# Altium PCB v2上.PcbDoc
Units mm, origin at the board's own origin, x right, y up, seen from the top; angles counter-clockwise.
Board outline 76.2 x 58.42 mm, 2 copper layers (Top Layer, Bottom Layer), stack 0.325 mm thick; 4 components, 7 nets, 88 pads, 0 vias.
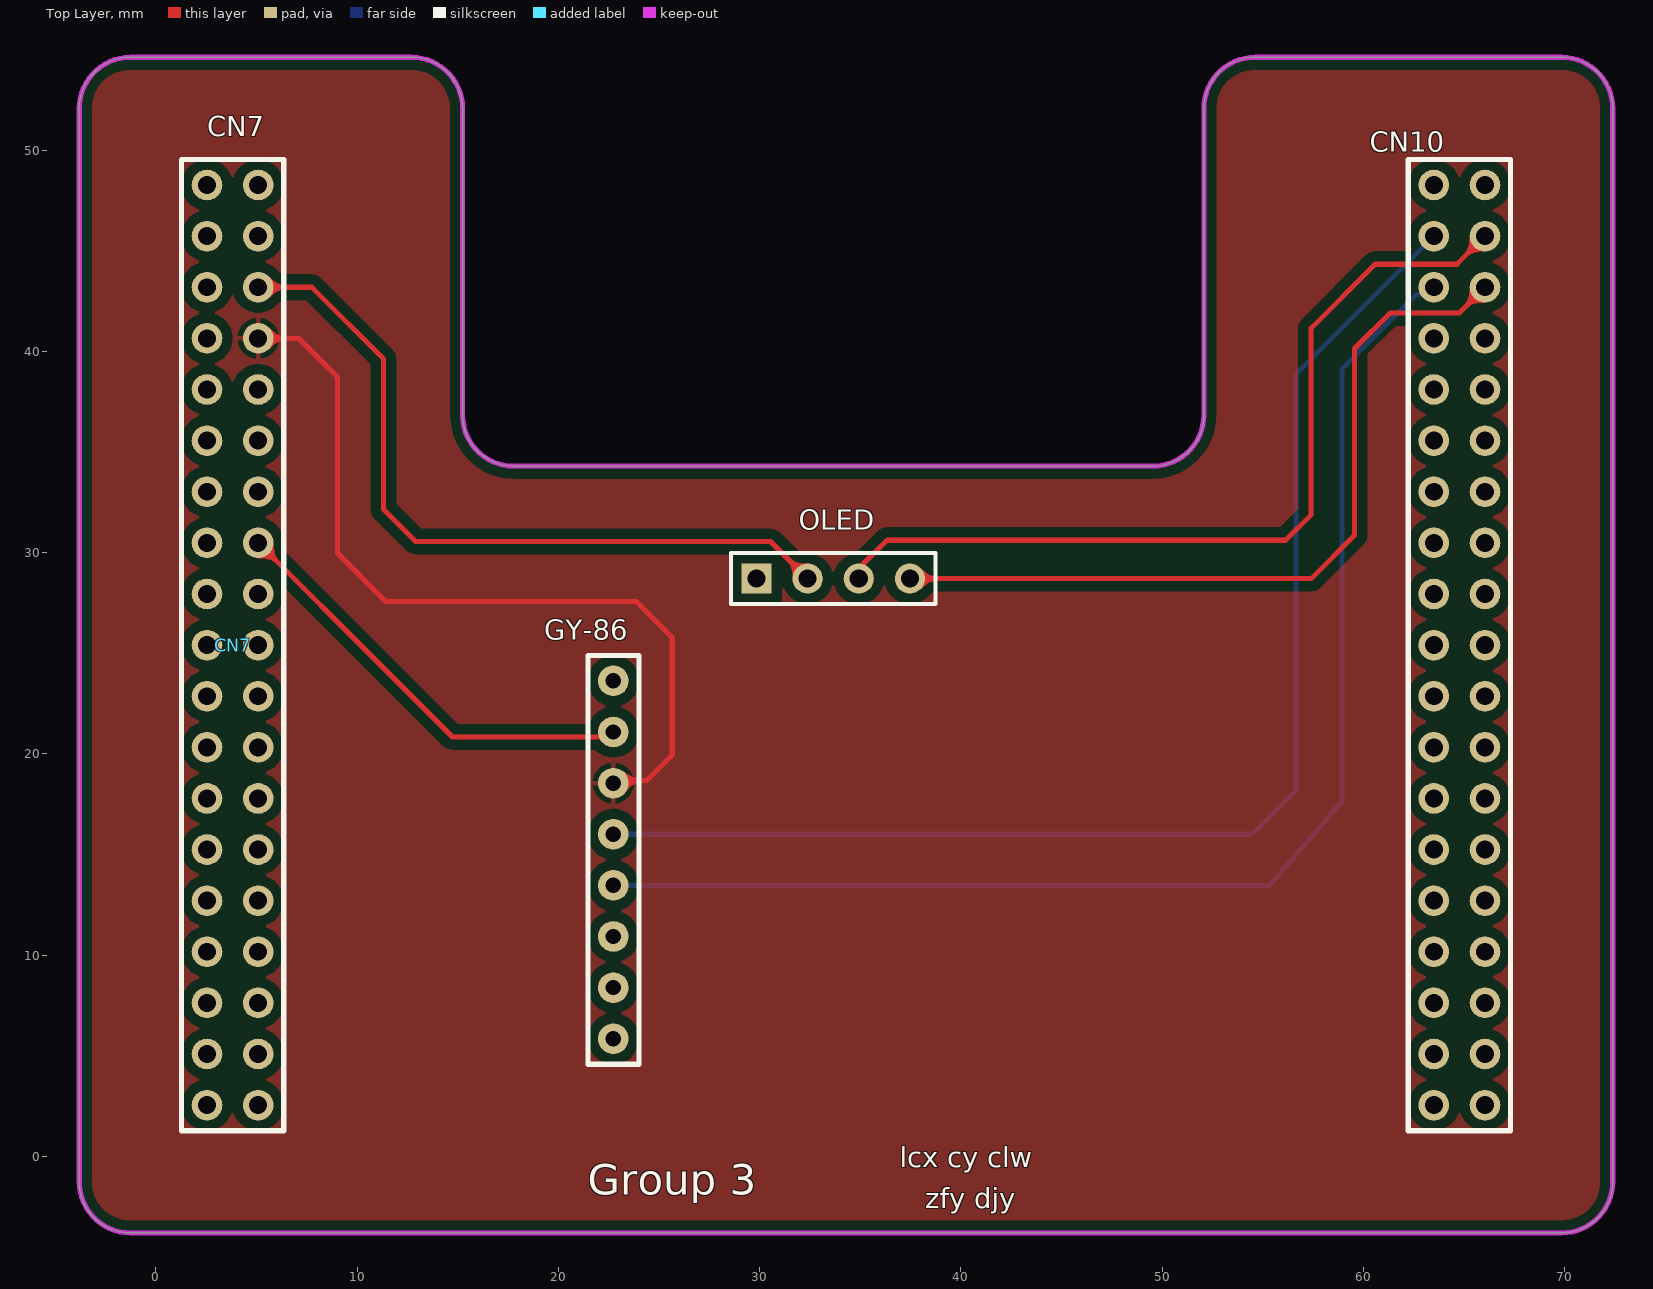
[diagram p0: Top Layer view]
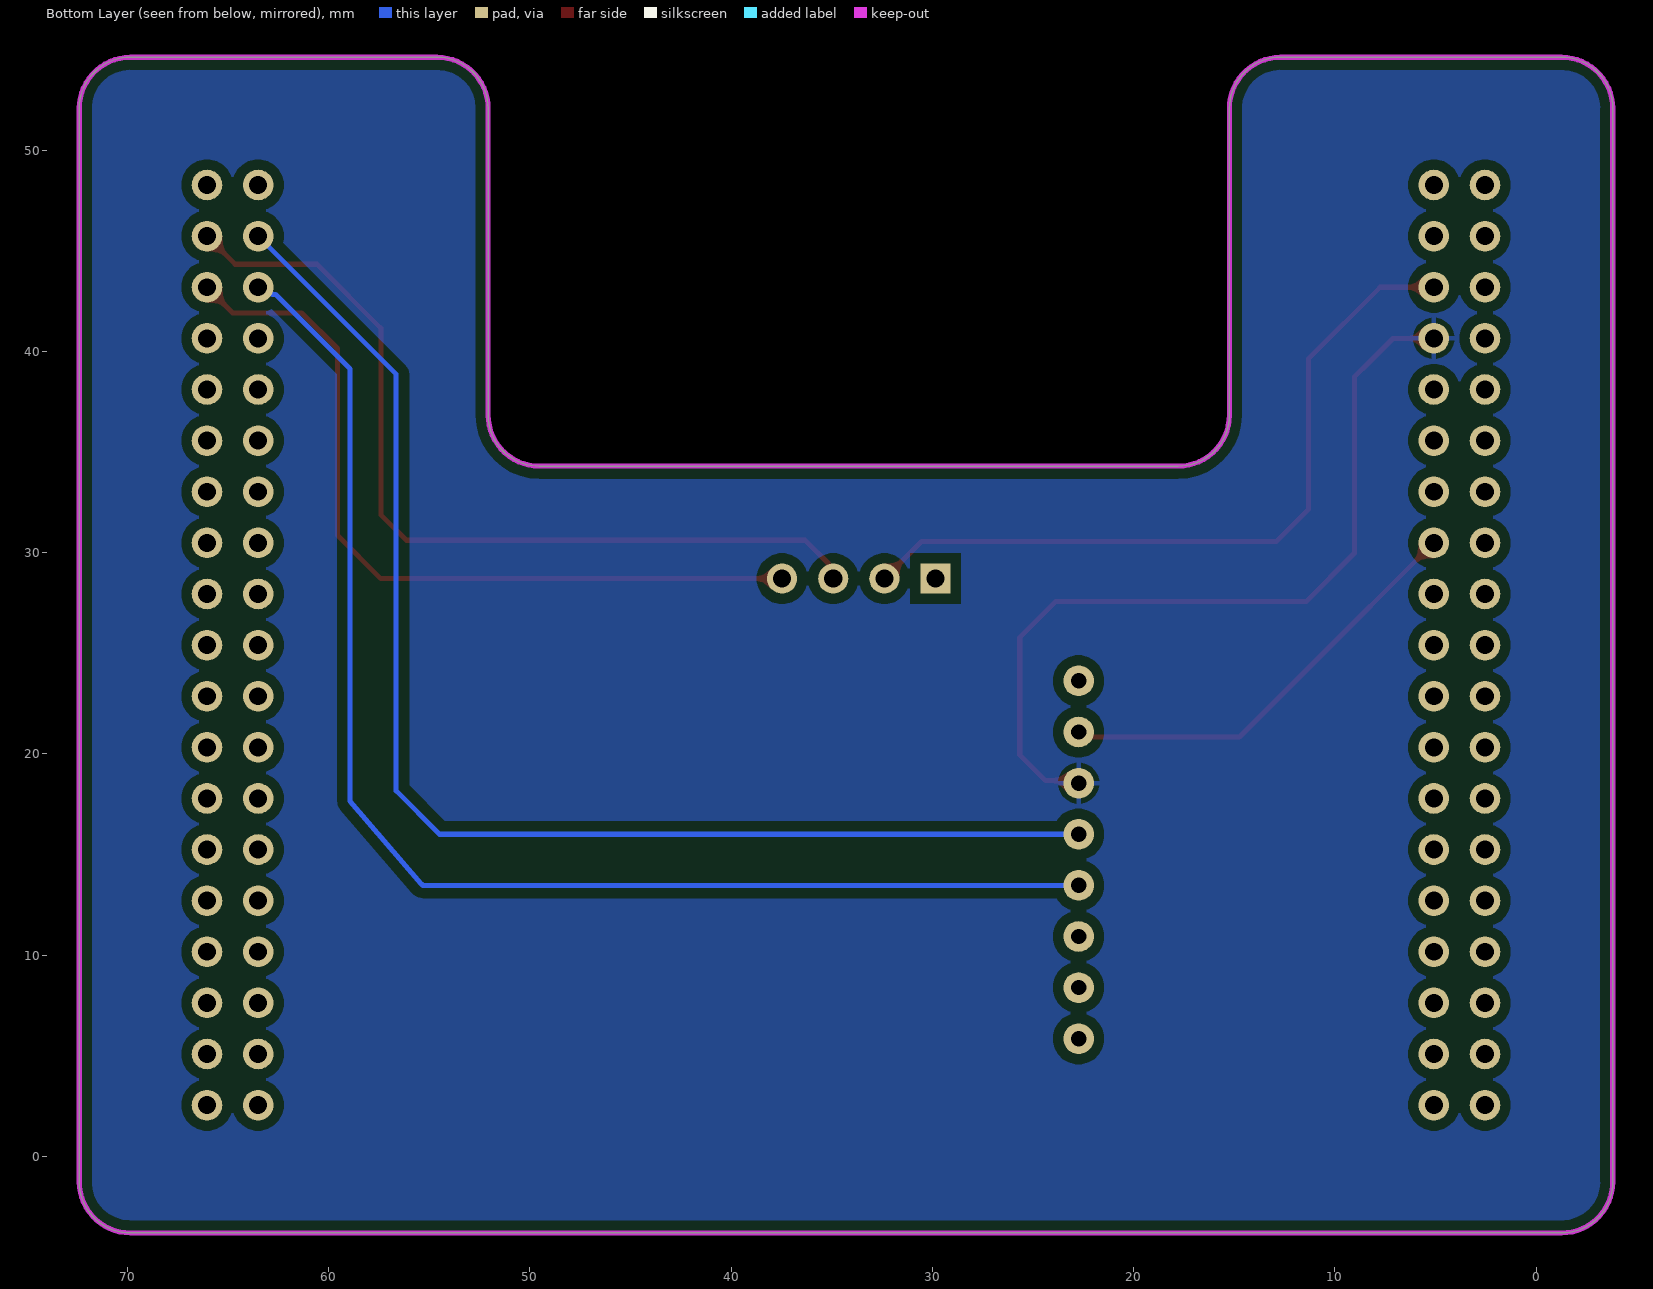
[diagram p1: Bottom Layer view, seen from below]

## Layer stack, top to bottom
Top Solder: solder mask 0.0102, Solder Resist, Dk 3.5
Top Layer: signal copper 0.0356
Dielectric 1: core 0.254, FR-4, Dk 4.2
Bottom Layer: signal copper 0.0356
Bottom Solder: solder mask 0.0102, Solder Resist, Dk 3.5

## Board outline
-3.81,-1.27 ccw(c-1.27,-1.27) -1.27,-3.81 69.85,-3.81 ccw(c69.85,-1.27) 72.39,-1.27 72.39,52.07 ccw(c69.85,52.07) 69.85,54.61 54.61,54.61 ccw(c54.61,52.07) 52.07,52.07 52.07,36.83 cw(c49.53,36.83) 49.53,34.29 17.78,34.29 cw(c17.78,36.83) 15.24,36.83 15.24,52.07 ccw(c12.7,52.07) 12.7,54.61 -1.27,54.61 ccw(c-1.27,52.07) -3.81,52.07

## Design rules (kind name [scope] priority, off if disabled: settings)
Clearance InPolygon [InPolygon] p1: gap=0.5 ignorepadtopadclearanceinfootprint=FALSE except(0: Arc-Hole Track-Hole SMDPad-Hole THPad-Hole Via-Hole Fill-Hole Poly-Hole Region-Hole Text-Hole)
Clearance [All] p2: gap=0.254 ignorepadtopadclearanceinfootprint=FALSE except(0: Arc-Hole Track-Hole SMDPad-Hole THPad-Hole Via-Hole Fill-Hole Poly-Hole Region-Hole Text-Hole)
PolygonConnect [All] p1: connectstyle=Relief reliefconductorwidth=0.254 reliefentries=4 polygonreliefangle="90 Angle" airgapwidth=0.254
RoutingVias [All] p1: holewidth=0.711 width=1.27 viastyle="Through Hole" minholewidth=0.711 minwidth=1.27 maxholewidth=0.711 maxwidth=1.27
SolderMaskExpansion [All] p1: expansion=0.102 istentingtop=FALSE
Width Width_5V [InNetClass('5V')] p1: maxlimit=0.51 minlimit=0.506 preferedwidth=0.508
Width Width_3V3 [InNetClass('3V3')] p2: maxlimit=0.51 minlimit=0.506 preferedwidth=0.508
Width [All] p3: maxlimit=0.256 minlimit=0.252 preferedwidth=0.254
30 further rules are at their usual default settings.

## Classes and differential pairs
component class v2上: CN7 OLED

## Components (designator, comment, footprint, x,y, rotation, side; value= is the part's Value field where it differs from the comment)
CN7 "CN7" CN7 2.54,2.54 r0 top
GY-86 "GY-86" GY-86 22.733,23.622 r0 top
OLED "OLED" HDR1X4 29.845,28.702 r0 top
? "CN10" CN10 66.04,2.54 r0 top

## Footprints (in the part's own frame and the unit in brackets; to place one, negate y for a bottom-side part, rotate by r counter-clockwise, add the part's x,y. Pads: shape width x height; smd on the part's side, far side on the other; paste and mask are expansions set on the pad)
CN7 [mil]
  round 60 hole 35: 1(0,1800) 2(100,1800) 3(0,1700) 4(100,1700) 5(0,1600) 6(100,1600) 7(0,1500) 8(100,1500) 9(0,1400) 10(100,1400) 11(0,1300) 12(100,1300) 13(0,1200) 14(100,1200) 15(0,1100) 16(100,1100) 17(0,1000) 18(100,1000) 19(0,900) 20(100,900) 21(0,800) 22(100,800) 23(0,700) 24(100,700) 25(0,600) 26(100,600) 27(0,500) 28(100,500) 29(0,400) 30(100,400) 31(0,300) 32(100,300) 33(0,200) 34(100,200) 35(0,100) 36(100,100) 37(0,0) 38(100,0)
  silkscreen extent -50,-50 150,1850
CN10 [mil]
  round 60 hole 35: 1(-100,1800) 2(0,1800) 3(-100,1700) 4(0,1700) 5(-100,1600) 6(0,1600) 7(-100,1500) 8(0,1500) 9(-100,1400) 10(0,1400) 11(-100,1300) 12(0,1300) 13(-100,1200) 14(0,1200) 15(-100,1100) 16(0,1100) 17(-100,1000) 18(0,1000) 19(-100,900) 20(0,900) 21(-100,800) 22(0,800) 23(-100,700) 24(0,700) 25(-100,600) 26(0,600) 27(-100,500) 28(0,500) 29(-100,400) 30(0,400) 31(-100,300) 32(0,300) 33(-100,200) 34(0,200) 35(-100,100) 36(0,100) 37(-100,0) 38(0,0)
  silkscreen extent -150,-50 50,1850
GY-86 [mil]
  round 60 hole 30: 1(0,0) 2(0,-100) 3(0,-200) 4(0,-300) 5(0,-400) 6(0,-500) 7(0,-600) 8(0,-700)
  silkscreen extent -50,-750 50,50
HDR1X4 [mm] "Connector; Header; 4 Position"
  rect 1.5x1.5 hole 0.9: 1(0,0)
  round 1.5 hole 0.9: 2(2.54,0) 3(5.08,0) 4(7.62,0)
  silkscreen extent -1.27,-1.27 8.89,1.27

## Part data
OLED: library part "Header 4", "Header, 4-Pin", LatestRevisionDate=17-Jul-2002, LatestRevisionNote="Re-released for DXP Platform.", Publisher="Altium Limited"

## Nets (pads, with @x,y where several pads share a name; then routed paths per layer and width w, separated by ;. In a path a pad name is that pad's centre, name@x,y a point inside that pad or via, vN(x,y) a via of type N, cw(c..) or ccw(c..) an arc to the next point about the centre after c; other vN are vias at no path point)
3V3_2: CN7.16 GY-86.2 | length 21.8
  Top Layer w0.254: CN7.16 11.303,24.257 14.732,20.828 21.949,20.828 21.96,20.839 22.49,20.839 GY-86.2
5V: CN7.6 OLED.2 | length 37.6
  Top Layer w0.254: CN7.6 7.747,43.18 11.303,39.624 11.303,32.153 12.909,30.547 30.54,30.547 32.131,28.956 OLED.2@32.385,28.956
GND: CN7.8 GY-86.3 | length 41.2
  Top Layer w0.254: CN7.8 7.112,40.64 8.255,39.497 9.017,38.735 9.017,29.972 11.43,27.559 23.876,27.559 25.654,25.781 25.654,19.939 24.384,18.669 GY-86.3@22.733,18.669
PB8: ?.3 GY-86.4 | length 65.4
  Bottom Layer w0.254: GY-86.4 22.857,15.878 GY-86.4@22.932,15.803 ; GY-86.4@22.987,16.383 22.987,16.335 23.32,16.002 54.483,16.002 56.642,18.161 56.642,38.862 ?.3
PB9: ?.5 GY-86.5 | length 65.9
  Top Layer w0.254: GY-86.5@22.733,13.208 GY-86.5
  Bottom Layer w0.254: GY-86.5@22.744,13.451 55.312,13.451 55.386,13.526 55.393,13.533 55.399,13.54 58.928,17.646 58.928,39.116 62.628,42.816 62.793,42.816 63.029,43.053 ?.5@63.373,43.053
PC5: ?.6 OLED.4 | length 40
  Top Layer w0.254: OLED.4 57.404,28.702 59.563,30.861 59.563,40.132 61.341,41.91 64.77,41.91 ?.6
PC6: ?.4 OLED.3 | length 43.9
  Top Layer w0.254: OLED.3 35.163,28.94 35.163,29.448 36.322,30.607 56.134,30.607 57.404,31.877 57.404,41.148 60.579,44.323 64.643,44.323 ?.4
pads on no net: ?.1 ?.2 ?.7 ?.8 ?.9 ?.10 ?.11 ?.12 ?.13 ?.14 ?.15 ?.16 ?.17 ?.18 ?.19 ?.20 ?.21 ?.22 ?.23 ?.24 ?.25 ?.26 ?.27 ?.28 ?.29 ?.30 ?.31 ?.32 ?.33 ?.34 ?.35 ?.36 ?.37 ?.38 CN7.1 CN7.2 CN7.3 CN7.4 CN7.5 CN7.7 CN7.9 CN7.10 CN7.11 CN7.12 CN7.13 CN7.14 CN7.15 CN7.17 CN7.18 CN7.19 CN7.20 CN7.21 CN7.22 CN7.23 CN7.24 CN7.25 CN7.26 CN7.27 CN7.28 CN7.29 CN7.30 CN7.31 CN7.32 CN7.33 CN7.34 CN7.35 CN7.36 CN7.37 CN7.38 GY-86.1 GY-86.6 GY-86.7 GY-86.8 OLED.1

## Polygon pours and split planes (outlines as drawn)
GND on Bottom Layer "GND_L02_P001" (solid, remove dead copper, pour order 1): 70.358,54.61 70.866,54.61 71.882,53.594 72.229,52.959 72.39,52.451 72.39,-1.905 72.136,-2.159 72.136,-2.54 70.993,-3.683 68.072,-3.683 67.818,-3.937 67.564,-3.683 -2.413,-3.683 -3.556,-2.54 -3.556,-2.032 -3.81,-1.778 -3.81,52.832 -3.048,53.594 -3.048,53.848 -2.921,53.848 -2.286,54.483 -1.143,54.483 -1.016,54.61 13.589,54.61 14.224,53.975 14.478,53.975 14.478,53.721 15.24,52.959 15.24,36.703 15.367,36.576 15.367,35.687 16.383,34.671 16.891,34.671 17.272,34.29 49.53,34.29 49.784,34.544 50.673,34.544 52.07,35.941 52.07,52.959 53.086,53.975 53.086,54.229 53.594,54.229 54.102,54.737 70.358,54.737 70.612,54.483
GND on Top Layer "GND_L01_P002" (solid, remove dead copper, pour order 2): -3.175,53.848 -3.81,53.213 -3.81,-1.524 -3.683,-1.651 -3.683,-2.54 -2.667,-3.556 -2.032,-3.556 -1.778,-3.81 -1.651,-3.683 70.993,-3.683 72.136,-2.54 72.136,-2.159 72.39,-1.905 72.39,52.324 72.136,52.578 72.136,53.34 71.374,54.102 71.12,54.102 70.612,54.61 54.102,54.61 53.431,54.32 52.832,53.975 52.832,53.721 52.07,52.959 52.07,36.449 51.816,36.195 51.816,35.687 50.673,34.544 50.165,34.544 49.911,34.29 16.891,34.544 16.129,35.052 16.002,35.052 16.002,35.179 15.24,35.941 15.24,52.451 15.113,52.578 15.113,53.213 14.478,53.848 14.351,53.848 13.716,54.483 13.462,54.483 13.208,54.737 -0.889,54.737 -1.016,54.61 -2.413,54.61 -2.921,54.102 -3.048,54.102

## Keep-outs
Keep-Out Layer:
  the board outline again, w0.254

## Silkscreen, mask and mechanical layers (free items; w line width, h text height)
Top Overlay:
  text "lcx cy clw" at 36.957,-0.556 h1
  text "Group 3" at 21.463,-1.905 h1.52
  text "zfy djy" at 38.227,-2.588 h1
Mechanical 1:
  the board outline again, w0.254